# EAGLE board FishShield_v2 (EAGLE 7.5.0)
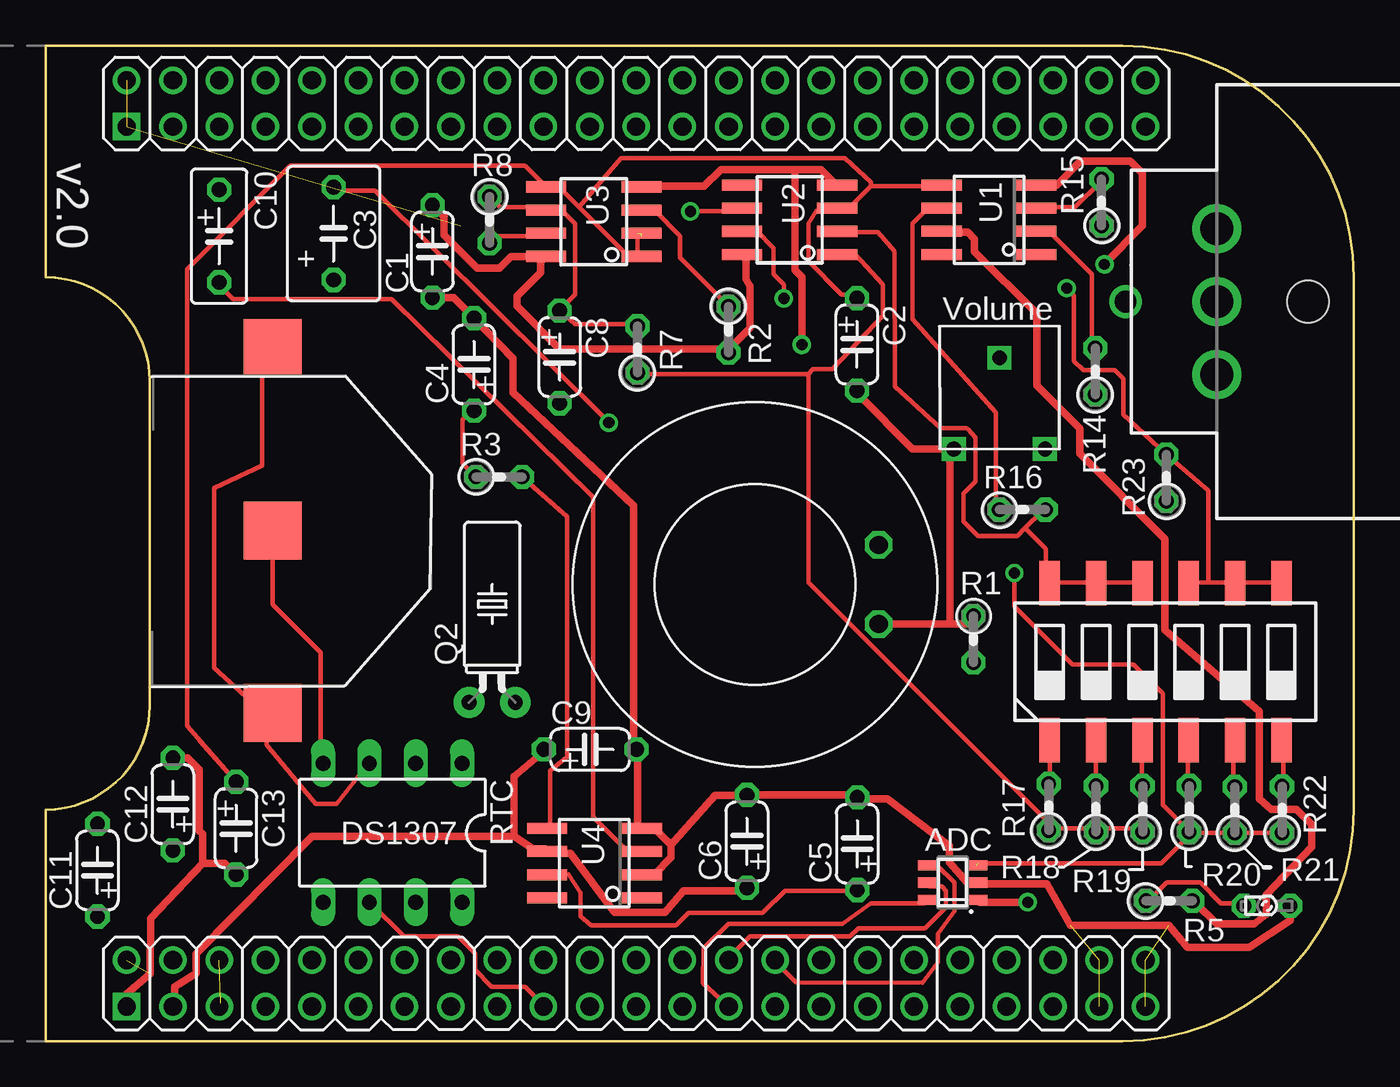
[diagram p0: board, top side]
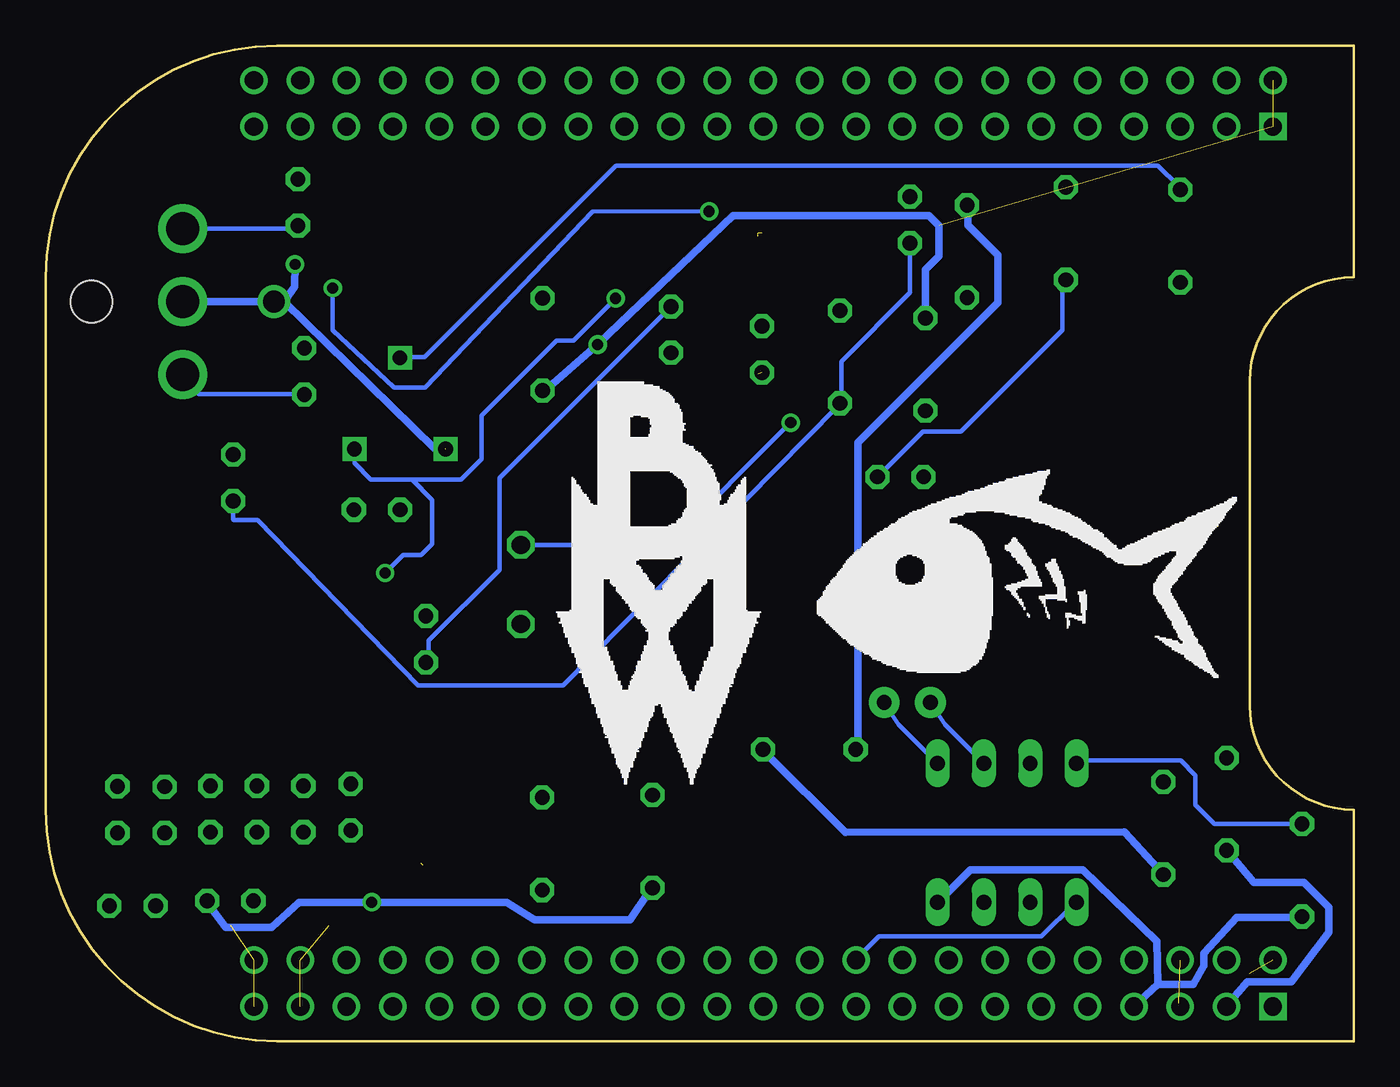
[diagram p1: board, bottom side, seen from below]

Size 71.76 x 54.61 mm. Coordinates in mm from the lower left corner, seen from the top.
Copper layers (1*16): Top 0.035mm / dielectric 1.5mm / Bottom 0.035mm
Design rules "default": minimum track width 10mil, minimum drill 24mil, track to track 8mil, track to pad 8mil, pad to pad 8mil, via to via 8mil, smd to smd 8mil, copper to edge 40mil, drill to drill 8mil, minimum pad ring 10mil, minimum via ring 8mil, stop-mask expansion 4mil, vias tented up to drill 0mil, thermal gap 10mil

## Footprints (pad centres in the part's own frame; a part is rotated, then mirrored left to right if it is on the bottom)
SOT23-6 = smd 0.55 x 1.2: 1 0.95,1.3; 2 0,1.3; 3 -0.95,1.3; 4 -0.95,-1.3; 5 0,-1.3; 6 0.95,-1.3
C050-024X044 = drill 0.813 octagon: 1 -2.54,0; 2 2.54,0
C050-050X075 = drill 0.813 octagon: 1 -2.54,0; 2 2.54,0
C050-030X075 = drill 0.813 octagon: 1 -2.54,0; 2 2.54,0
LSU260 = drill 0.813 octagon: A -1.27,0; K 1.27,0
10K_POT = drill 0.8 square: V- -2.5,0; VIN 2.5,0; VOUT 0,5
TC38H = drill 0.813 pad 1.676: 1 -1.27,0; 2 1.27,0
0204V = drill 0.813 octagon: 1 -1.27,0; 2 1.27,0
DIL08 = drill 0.813 long: 1 -3.81,-3.81; 2 -1.27,-3.81; 3 1.27,-3.81; 4 3.81,-3.81; 5 3.81,3.81; 6 1.27,3.81; 7 -1.27,3.81; 8 -3.81,3.81
CTS-219-06 = smd 1.13 x 2.44: 1 -6.35,-4.3; 2 -3.81,-4.3; 3 -1.27,-4.3; 4 1.27,-4.3; 5 3.81,-4.3; 6 6.35,-4.3; 7 6.35,4.3; 8 3.81,4.3; 9 1.27,4.3; 10 -1.27,4.3; 11 -3.81,4.3; 12 -6.35,4.3
SO8 = smd 0.6 x 2.2: 1 -1.905,-2.6; 2 -0.635,-2.6; 3 0.635,-2.6; 4 1.905,-2.6; 5 1.905,2.6; 6 0.635,2.6; 7 -0.635,2.6; 8 -1.905,2.6
SOIC-8 = smd 2.21 x 0.61: 1 -2.616,1.905; 2 -2.616,0.635; 3 -2.616,-0.635; 4 -2.616,-1.905; 5 2.616,-1.905; 6 2.616,-0.635; 7 2.616,0.635; 8 2.616,1.905
SO08 = smd 0.6 x 2.2: 1 -1.905,-2.6; 2 -0.635,-2.6; 3 0.635,-2.6; 4 1.905,-2.6; 5 1.905,2.6; 6 0.635,2.6; 7 -0.635,2.6; 8 -1.905,2.6
BEAGLEBONE_SHIELD = drill 1 square: 1 4.445,19.05; 47 52.705,19.05 | drill 1: 2 1.905,19.05; 3 4.445,21.59; 4 1.905,21.59; 5 4.445,24.13; 6 1.905,24.13; 7 4.445,26.67; 8 1.905,26.67; 9 4.445,29.21; 10 1.905,29.21; 11 4.445,31.75; 12 1.905,31.75; 13 4.445,34.29; 14 1.905,34.29; 15 4.445,36.83; 16 1.905,36.83; 17 4.445,39.37; 18 1.905,39.37; 19 4.445,41.91; 20 1.905,41.91; 21 4.445,44.45; 22 1.905,44.45; 23 4.445,46.99; 24 1.905,46.99; 25 4.445,49.53; 26 1.905,49.53; 27 4.445,52.07; 28 1.905,52.07; 29 4.445,54.61; 30 1.905,54.61; 31 4.445,57.15; 32 1.905,57.15; 33 4.445,59.69; 34 1.905,59.69; 35 4.445,62.23; 36 1.905,62.23; 37 4.445,64.77; 38 1.905,64.77; 39 4.445,67.31; 40 1.905,67.31; 41 4.445,69.85; 42 1.905,69.85; 43 4.445,72.39; 44 1.905,72.39; 45 4.445,74.93; 46 1.905,74.93; 48 50.165,19.05; 49 52.705,21.59; 50 50.165,21.59; 51 52.705,24.13; 52 50.165,24.13; 53 52.705,26.67; 54 50.165,26.67; 55 52.705,29.21; 56 50.165,29.21; 57 52.705,31.75; 58 50.165,31.75; 59 52.705,34.29; 60 50.165,34.29; 61 52.705,36.83; 62 50.165,36.83; 63 52.705,39.37; 64 50.165,39.37; 65 52.705,41.91; 66 50.165,41.91; 67 52.705,44.45; 68 50.165,44.45; 69 52.705,46.99; 70 50.165,46.99; 71 52.705,49.53; 72 50.165,49.53; 73 52.705,52.07; 74 50.165,52.07; 75 52.705,54.61; 76 50.165,54.61; 77 52.705,57.15; 78 50.165,57.15; 79 52.705,59.69; 80 50.165,59.69; 81 52.705,62.23; 82 50.165,62.23; 83 52.705,64.77; 84 50.165,64.77; 85 52.705,67.31; 86 50.165,67.31; 87 52.705,69.85; 88 50.165,69.85; 89 52.705,72.39; 90 50.165,72.39; 91 52.705,74.93; 92 50.165,74.93
SPEAKER = drill 1 octagon: P$1 -2.17,-6.78; P$2 2.17,-6.78
BATTERY = smd 3.175 x 3.175: NEG 0,0; POS 10,0; POS2 -10,0
NC3FD-H = drill 1.8: 1 -4,0; 2 4,0; 3 0,0 | drill 1.2: G 0,-5 | hole 2.3: 0,5

## Placement (x,y rotation side)
ADC  ADS7883  [SOT23-6]  49.75,8.7 270 top
C1  10uF  [C050-024X044]  21.21,43.32 270 top
C2  0.1uF  [C050-024X044]  44.5,38.22 270 top
C3  220uF  [C050-050X075]  15.79,44.3 90 top
C4  0.047uF  [C050-024X044]  23.5,37.12 90 top
C5  0.1uF  [C050-024X044]  44.52,10.83 90 top
C6  0.1uF  [C050-024X044]  38.47,10.96 90 top
C8  560pF  [C050-024X044]  28.2,37.53 270 top
C9  1uF  [C050-024X044]  29.86,16 0 top
C10  10uF  [C050-030X075]  9.52,44.16 270 top
C11  0.1uF  [C050-024X044]  2.84,9.38 90 top
C12  0.1uF  [C050-024X044]  6.98,13 90 top
C13  10uF  [C050-024X044]  10.45,11.68 270 top
LED1  [LSU260]  66.98,7.43 0 top
P1  POT  [10K_POT]  52.31,32.48 0 top
Q2  [TC38H]  24.5,18.58 0 top
R1  10k  [0204V]  50.9,22.05 270 top
R2  10k  [0204V]  37.45,39.03 270 top
R3  10  [0204V]  24.87,30.95 0 top
R5  390  [0204V]  61.62,7.7 0 top
R7  5.1k  [0204V]  32.47,37.95 90 top
R8  5.1k  [0204V]  24.35,45.05 270 top
R14  47k  [0204V]  57.56,36.74 90 top
R15  47k  [0204V]  57.92,46.01 90 top
R16  1k  [0204V]  53.58,29.15 0 top
R17  1k  [0204V]  55.02,12.84 90 top
R18  10k  [0204V]  57.62,12.74 90 top
R19  100k  [0204V]  60.17,12.74 90 top
R20  1k  [0204V]  62.72,12.74 90 top
R21  10k  [0204V]  65.22,12.69 90 top
R22  100k  [0204V]  67.81,12.7 90 top
R23  1k  [0204V]  61.47,30.9 90 top
RTC  DS1307  [DIL08]  19.03,11.43 180 top
S2  219-06  [CTS-219-06]  61.42,20.81 0 top
U1  AD623R  [SO8]  51.75,45.06 90 top
U2  U2  [SOIC-8]  40.81,45.05 180 top
U3  U3  [SOIC-8]  30.07,44.95 180 top
U4  [SO08]  30.1,9.77 90 top
U$3  BEAGLEBONE_OUTLINE  [BEAGLEBONE_SHIELD]  -14.61,54.61 270 top
U$4  SPEAKER  [SPEAKER]  38.92,25.05 90 top
U$5  BATTERY  [BATTERY]  12.45,28.01 90 top
X1  NC3FD-H  [NC3FD-H]  64.23,40.57 270 top

## Library data of the parts
ADC C1-C6 C8-C13 P1 U2 U3 U$4 U$5 = Personal
LED1 RTC U$3 = adafruit
Q2 = adafruit; OC_FARNELL: unknown; OC_NEWARK: unknown
R1-R3 R5 R7 R8 R14-R23 = resistor
S2 = Personal; OC_FARNELL: unknown; OC_NEWARK: unknown
U1 = analog-devices; MPN: AD623ARZ.; OC_FARNELL: 9426213; OC_NEWARK: 31M4186
U4 = linear
X1 = con-neutrik_ag; MF: NEUTRIK; MPN: NC3FD-H; OC_FARNELL: 1608398; OC_NEWARK: 87F6600

## Nets
+5V: C11.1 RTC.8 U$3.53
AIN0: U$3.85
CS: ADC.6 U$3.73
GAIN1: R16.2 S2.10 S2.11 S2.12 U2.2
GAIN1_OUT: R7.1 R17.1 R18.1 R19.1
GAIN2: R23.2 S2.7 S2.8 S2.9 U2.6
GAIN2_OUT: ADC.3 P1.VIN R20.1 R21.1 R22.1 U2.7
GND: ADC.2 C1.2 C2.2 C4.2 C5.2 C6.2 C9.2 C12.2 C13.2 LED1.K P1.V- R1.1 U1.4 U2.4 U3.4 U4.2 U4.4 U$3.1 U$3.2 U$3.47 U$3.48 U$3.89 U$3.90 U$3.91 U$3.92 U$4.P$1 X1.3 X1.G
N$1: R14.1 X1.2
N$2: R15.2 U1.3
N$3: R14.2 U1.2
N$4: R16.1 U1.6
N$5: R1.2 R2.1 U3.3
N$6: LED1.A R5.1
N$7: RTC.3 U$5.POS U$5.POS2
N$8: C10.1 P1.VOUT
N$9: C8.1 R7.2 R8.1 U3.6
N$10: C8.2 R8.2 R23.1 U3.7
N$12: U2.5
N$13: R20.2 S2.4
N$14: C10.2 U4.3
N$15: C5.1 U4.7
N$16: C3.1 R3.2 U4.5
N$18: R17.2 S2.1
N$19: C3.2 U$4.P$2
N$20: R21.2 S2.5
N$21: R22.2 S2.6
N$22: R18.2 S2.2
N$23: R19.2 S2.3
N$24: Q2.1 RTC.2
N$26: C4.1 R3.1
N$27: Q2.2 RTC.1
N$28: C11.2 RTC.4 U$5.NEG
R15: R15.1 X1.1
RTC_SCL: RTC.6 U$3.65
RTC_SDA: RTC.5 U$3.66
SCLK: ADC.4 U$3.76
SDO: ADC.5 U$3.74
VCC: ADC.1 C1.1 C6.1 C9.1 C12.1 R2.2 R5.2 U1.7 U2.8 U3.8 U4.6 U$3.49
VCC/2: C2.1 C13.1 U1.5 U2.3 U3.1 U3.2 U3.5
VDD_3V3EXP: U$3.50
VDD_5V: U$3.51 U$3.52

## Tracks (layer width: path | path; a pad name or v marks a point on that pad's centre or on a via)
+5V
  Bottom 0.406: 10.74,3.12 8.81,3.12 8.23,4.14 8.23,4.83 6.43,6.78 3.1,6.78 C11.1 | U$3.53 10.74,3.12 | 10.74,3.12 10.82,5.49 14.86,9.4 21.03,9.4 22.63,7.8 RTC.8
CS
  Top 0.254: ADC.6 48.23,7.57 45.26,7.57 43.71,6.43 37.47,6.43 36.09,5.1 36.04,3.17 37.26,2.08 U$3.73
GAIN1
  Top 0.254: S2.10 60.12,25.17 57.84,25.17 S2.11 57.61,25.17 55.09,25.17 S2.12 54.86,25.17 54.86,27 53.72,28.14 | 53.72,28.14 54.64,29.06 R16.2 | U2.2 43.43,44.37 45.64,44.37 46.55,43.34 46.58,35.91 49.09,33.63 50.5,33.63 50.57,33.57 51.01,33.11 51.01,30.71 50.34,30.05 50.34,28.5 51.13,27.71 53.29,27.71 53.72,28.14
GAIN1_OUT  (1 unrouted)
  Top 0.254: R19.1 60.12,11.68 57.84,11.68 R18.1 57.61,11.68 55.09,11.68 R17.1 54.86,11.68 54.86,12.14 41.83,25.17 41.83,36.6 | 32.69,36.6 41.83,36.6 | 41.83,36.6 42.09,36.86 43.16,36.86 45.93,39.81 45.93,41.51 44.41,43.15 43.53,43.15
GAIN2  (via drill 0.6, 0.61)
  Top 0.254: 63.78,25.17 65.15,25.17 S2.8 65.38,25.17 67.67,25.17 S2.7 | 63.78,25.17 62.87,25.17 S2.9 | v35.36,45.52 38.41,45.52 U2.6 | 63.78,25.17 63.78,30.2 62.81,31.02 R23.2 59.11,34.36 59.11,36.3 59.11,36.36 58.66,36.81 56.91,36.81 56.41,37.31 56.41,40.9 v56,41.31
  Bottom 0.254: v35.36,45.52 41.76,45.49 50.95,35.84 52.63,35.84 56.01,39.02 56.01,40.86 v56,41.31
GAIN2_OUT  (via drill 0.6, 0.61)  (1 unrouted)
  Top 0.254: R22.1 R21.1 62.77,11.42 R20.1 | R20.1 61.27,12.97 61.27,19.07 59.67,20.68 56.31,20.68 53.14,23.85 v53.14,25.68 | R20.1 62.72,11.28 61.19,9.75 51.15,9.75 | 38.25,44.35 U2.7 38.2,44.42 39.01,44.42 39.93,43.51 39.93,42.06 40.49,41.5 v40.49,40.74
  Bottom 0.254: P1.VIN 54.81,31.7 53.92,30.81 52.2,30.81 51.66,30.81 | 51.66,30.81 48.97,30.81 47.85,31.93 47.85,34.31 43.74,38.43 42.8,38.43 v40.49,40.74 | v53.14,25.68 52.15,26.67 51.16,26.67 50.55,27.28 50.55,29.69 51.66,30.81
GND  (via drill 0.6, 0.61)  (8 unrouted)
  Top 0.254: 32.69,46.89 U3.4 | 45.72,22.88 U$4.P$1 | 49.61,32.49 P1.V- | 51.31,8.63 ADC.2 | 38.44,13.48 C6.2 | 32.46,11.91 U4.4 | 32.46,15.8 C9.2 | 50.52,8.71 50.98,8.71 | 44.58,13.28 C5.2 | 23.55,39.57 C4.2 | 41.1,47.73 41.02,47.8
  Top 0.406: 32.69,46.89 36.12,46.89 37.03,47.8 41.02,47.8 42.52,47.8 43.2,47.12 U2.4 | 49.61,22.88 50.52,22.88 50.75,23.11 R1.1 | 49.61,22.88 45.72,22.88 | 49.61,32.49 47.55,32.49 44.58,35.46 C2.2 | 49.61,22.88 49.61,32.26 P1.V- | 51.31,8.63 54.92,8.63 56.2,6.36 61.61,6.36 62.61,5.16 66.01,5.16 68.26,6.62 LED1.K | 34.29,10.77 34.29,10.08 33.4,9.14 33.05,9.14 U4.2 | 34.29,10.77 33.6,11.45 33.38,11.66 U4.4 | 38.44,13.48 36.71,13.49 34.29,10.77 | C5.2 44.35,13.51 38.63,13.51 C6.2 | 32.46,11.91 32.46,15.8 | 50.52,8.71 49.58,9.8 49.58,10.72 46.18,13.28 44.58,13.28 | 50.98,8.71 ADC.2 | C9.2 32.23,16.03 32.23,29.39 25.63,35.59 25.63,37.45 C4.2 22.38,40.78 C1.2 | U$3.47 4.45,2.6 5.73,3.71 5.76,6.73 8.61,9.76 | 8.61,9.76 8.61,11.36 8.43,11.53 8.43,14.91 7.8,15.54 C12.2 | U1.4 55.46,46.96 56.76,48.26 59.51,48.26 60.16,47.61 60.16,44.74 v58.08,42.61 | 8.61,9.76 9.82,9.76 C13.2 | v41.48,38.21 41.48,41.91 41.1,42.29 41.1,47.73
  Bottom 0.254: X1.G | C4.2
  Bottom 0.406: X1.G 63.86,40.57 X1.3 | C2.2 44.35,35.69 v41.48,38.21 40.84,38.81 34.06,45.29 23.32,45.29 22.75,44.73 22.75,43.06 23.5,42.31 C4.2 | C13.2 12.6,11.48 27.89,11.45 32.23,15.8 C9.2 | X1.G 58.67,40.58 | 58.67,40.58 58.09,41.4 v58.08,42.61 | 49.81,32.51 50.43,32.51 58.67,40.58
N$1
  Bottom 0.254: R14.1 57.55,35.48 63.37,35.49 64.01,36.37 X1.2
N$2
  Top 0.254: U1.3 54.41,45.74 56.46,45.74 57.84,47.12 R15.2
N$3
  Top 0.254: U1.2 54.41,44.37 55.09,44.37 57.38,42.09 57.38,38.2 R14.2
N$4
  Top 0.254: U1.6 48.92,45.52 48.23,45.52 47.55,44.83 47.55,39.6 52.12,34.47 52.12,29.29 R16.1
N$5
  Top 0.254: 32.44,45.57 U3.3 | 32.71,45.61 U3.3 | R2.1 37.45,40.33 34.8,42.98 34.8,44.17 33.48,45.49 32.78,45.49 U3.3
  Bottom 0.254: R1.2 50.75,20.83 50.75,21.97 46.86,25.86 46.86,30.89 37.49,40.26 R2.1
N$6
  Top 0.254: LED1.A 65.61,7.57 64.47,7.57 63.32,8.71 61.49,8.71 60.58,7.8 R5.1
N$7
  Top 0.254: RTC.3 17.6,15.11 15.95,13.01 14.81,13.01 12.12,16.26 12.12,17.86 U$5.POS2 11.89,18.09 9.26,20.46 9.26,30.34 11.89,31.57 11.89,37.74 U$5.POS
N$8
  Bottom 0.254: P1.VOUT 52.12,37.52 50.98,37.52 40.46,48.03 10.74,48.03 9.6,46.89 C10.1
N$9
  Top 0.254: R8.1 24.46,46.2 24.92,45.74 27.43,45.74 U3.6 27.66,45.52 28.35,45.52 29.03,44.83 29.03,40.95 28.35,40.26 C8.1 28.3,39.98 29.03,39.34 32.46,39.34 R7.2
N$10
  Top 0.254: U3.7 27.43,44.14 24.69,44.14 24.46,43.92 R8.2
  Bottom 0.254: R8.2 24.36,43.43 24.36,41.07 28.12,37.29 28.12,35 C8.2 28.35,34.77 43.38,19.51 51.33,19.51 60.12,28.6 61.45,28.6 61.45,28.61 R23.1
N$13
  Top 0.254: S2.4 62.64,16.48 62.64,14.2 R20.2
N$14
  Top 0.254: U4.3 32.69,10.54 31.78,10.54 30.02,12.29 30.02,29.84 18.97,40.72 10.29,40.72 9.6,41.4 C10.2
N$15
  Top 0.254: U4.7 28.68,9.14 29.34,8.13 29.34,6.86 29.92,6.35 34.57,6.35 35.25,7.04 39.32,7.04 40.54,8.25 44.35,8.25 C5.1
N$16
  Top 0.254: U4.5 27.66,11.68 27.66,14.83 28.6,15.6 28.6,28.77 R3.2
  Bottom 0.254: C3.1 16,41.63 16,39 21.55,33.45 23.64,33.45 R3.2
N$18
  Top 0.254: S2.1 55.09,16.48 55.09,14.2 R17.2
N$19  (via drill 0.61)
  Top 0.254: v30.89,33.93 18.06,46.66 16,46.66 C3.2
  Bottom 0.254: U$4.P$2 37.6,27.22 | 37.6,27.22 v30.89,33.93 37.6,27.22
N$20
  Top 0.254: S2.5 65.15,16.48 65.15,13.97 R21.2
N$21
  Top 0.254: S2.6 67.89,16.48 67.89,13.97 R22.2
N$22
  Top 0.254: S2.2 57.61,16.48 57.61,14.2 R18.2
N$23
  Top 0.254: S2.3 60.12,16.48 60.12,14.2 R19.2
N$24
  Bottom 0.254: Q2.1 22.43,17.38 RTC.2
N$26
  Top 0.254: C4.1 23.32,34.54 22.86,34.09 22.86,31.7 R3.1
N$27
  Bottom 0.254: Q2.2 24.97,17.38 RTC.1
N$28
  Top 0.254: RTC.4 15.09,15.34 15.09,21.31 12.45,23.95 U$5.NEG
  Bottom 0.254: C11.2 2.52,11.91 7.64,11.91 8.69,12.95 8.69,14.58 9.5,15.39 15.06,15.39 RTC.4
R15
  Bottom 0.254: X1.1 58.09,44.57 R15.1
RTC_SCL
  Top 0.254: RTC.6 17.83,7.57 19.66,5.74 22.63,5.74 23.55,4.83 23.55,3.91 24.46,3 26.29,3 27.2,2.08 U$3.65
RTC_SDA
  Bottom 0.254: RTC.5 15.32,7.57 17.14,5.74 26.06,5.74 27.2,4.6 U$3.66
SCLK
  Top 0.254: ADC.4 48.46,9.63 48.92,9.63 49.84,8.71 49.84,7.11 48.95,5.89 48.95,4.32 48.08,3.2 41.15,3.23 40,4.37 U$3.76
SDO
  Top 0.254: ADC.5 48.46,8.48 49.15,8.48 49.38,8.25 49.38,7.34 48.23,6.2 44.58,6.2 44.12,5.74 38.63,5.74 37.49,4.6 U$3.74
VCC  (via drill 0.61)
  Top 0.254: 51.21,7.62 ADC.1 | 49.15,44.37 U1.7 | 38.41,43 U2.8 | 37.49,37.97 R2.2 | 27.2,43.03 27.43,43 U3.8 | 27.43,10.54 U4.6
  Top 0.406: v53.86,7.62 51.21,7.62 | 49.15,44.37 50.59,44.37 50.95,44.01 50.95,43.31 54.36,39.9 54.36,35.97 56.72,33.6 56.72,32.23 61.39,27.56 61.39,22.55 66.57,18.09 66.57,13.28 67.23,12.72 68.61,12.72 69.44,11.89 69.44,10.67 66.95,8.03 66.95,6.96 66.29,6.43 64.24,6.43 63.09,7.57 R5.2 | 38.41,43 38.41,41.8 38.63,41.42 38.63,39.12 37.49,37.97 | R2.2 37.26,37.97 28.19,37.97 25.86,40.31 25.86,40.86 27.15,42.16 27.15,42.75 U3.8 27.2,43.03 25.52,43.03 24.9,42.41 23.65,42.41 21.86,44.21 21.86,45.22 C1.1 | 27.43,10.54 26.75,10.54 25.71,11.23 | 25.71,11.23 25.71,14.53 27.2,15.8 C9.1 | C6.1 38.41,8.25 34.98,8.25 33.96,7.06 31.19,7.06 28.8,10.31 27.66,10.31 U4.6 | 25.71,11.23 14.63,11.23 8.25,4.8 8.25,3.73 7.09,3 7.09,2.08 U$3.49
  Bottom 0.254: 21.18,45.83 C1.1
  Bottom 0.406: R5.2 62.87,7.57 61.87,6.25 59.36,6.25 57.84,7.62 v53.86,7.62 46.48,7.62 44.93,6.65 39.7,6.65 38.63,8.25 C6.1 | C12.1 5.49,8.71 2.74,8.71 1.37,7.34 1.37,5.97 3.43,3.25 5.84,3.25 6.86,2.08 U$3.49 | C9.1 27.2,16.03 27.2,32.84 19.53,40.51 19.53,43.1 21.18,44.76 21.18,45.83 | 21.26,45.81 C1.1
VCC/2  (2 unrouted)
  Top 0.254: 45.26,46.89 48.92,46.89 U1.5 | 45.26,46.89 44.12,45.74 43.43,45.74 U2.3 43.2,45.52 42.27,45.57 41.83,44.83 41.83,42.77 43.66,40.95 44.35,40.95 C2.1 | 32.46,43.23 31.78,43.23 29.26,45.74 | 29.26,45.74 28.35,46.66 27.66,46.66 U3.5 27.43,46.89 26.29,48.03 13.43,48.03 7.75,42.36 7.75,17.29 C13.1 8.46,16.48 | 32.46,43.23 U3.1 | 45.26,46.89 45.26,47.12 43.84,48.44 31.57,48.44 29.26,45.74 | 32.46,43.23 32.46,44.33
VDD_5V  (1 unrouted)
  Top 0.254: 9.6,2.08 U$3.51

## Text on the board
tPlace: v2.0 | Volume | R22 | ADC